# Altium PCB dcdc.PcbDoc
Units mm, origin at the board's own origin, x right, y up, seen from the top; angles counter-clockwise.
Board outline 19.5 x 19 mm, 2 copper layers (Top Layer, Bottom Layer); 10 components, 7 nets, 32 pads, 0 vias.
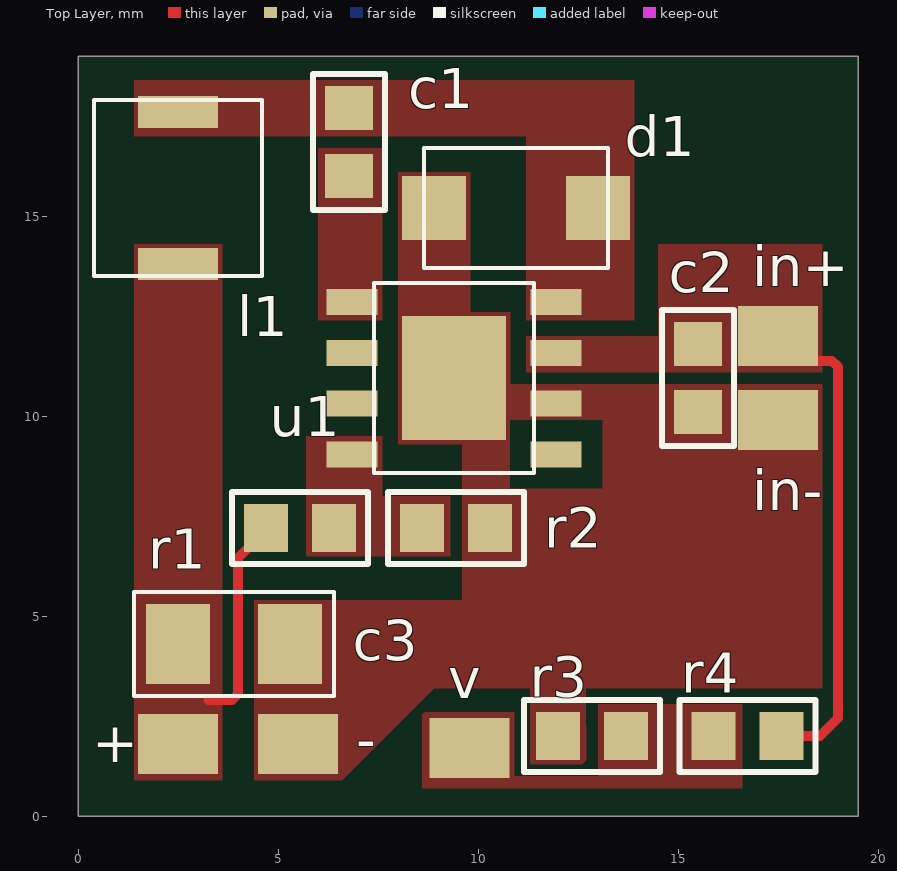
[diagram p0: Top Layer view]
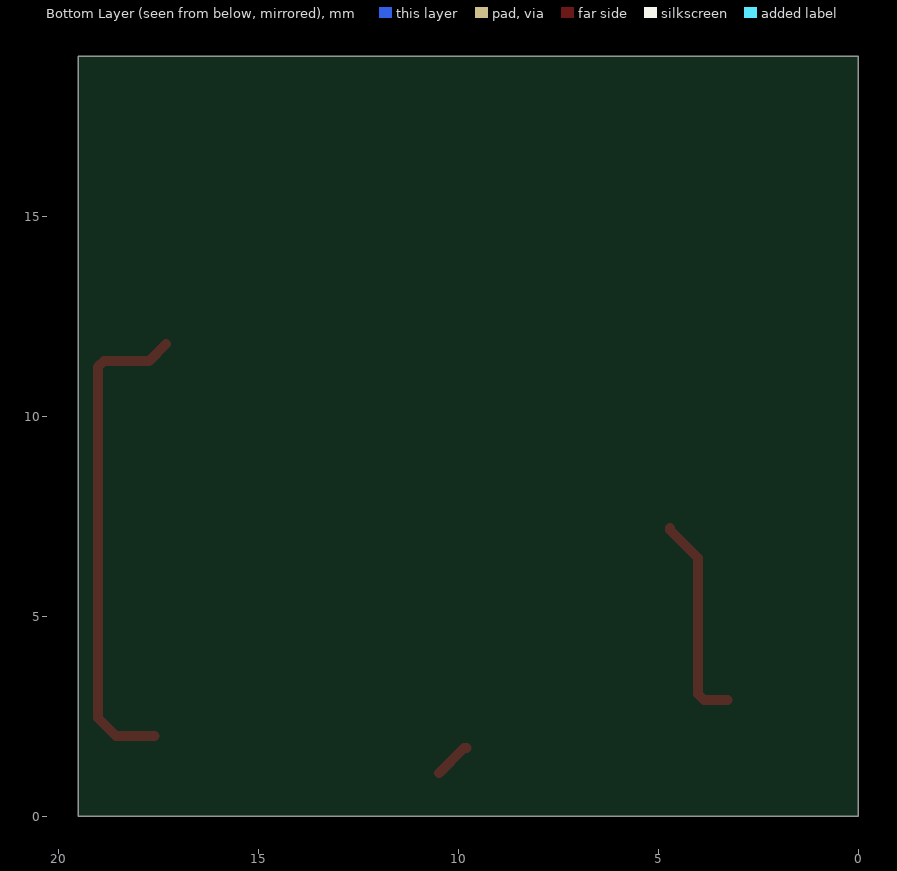
[diagram p1: Bottom Layer view, seen from below]

## Layer stack, top to bottom
Top Solder: solder mask 0.0102, Solder Resist, Dk 3.5
Top Layer: signal copper 0.0356
Dielectric 1: dielectric 0.32, FR-4, Dk 4.8
Bottom Layer: signal copper 0.0356
Bottom Solder: solder mask 0.0102, Solder Resist, Dk 3.5

## Board outline
0,0 19.5,0 19.5,19 0,19

## Design rules (kind name [scope] priority, off if disabled: settings)
Clearance [All] p1: gap=0.254 ignorepadtopadclearanceinfootprint=FALSE except(0: Arc-Hole Track-Hole SMDPad-Hole THPad-Hole Via-Hole Fill-Hole Poly-Hole Region-Hole Text-Hole)
PolygonConnect [All] p1: connectstyle=Relief reliefconductorwidth=0.254 reliefentries=4 polygonreliefangle="90 Angle" airgapwidth=0.254
RoutingVias [All] p1: holewidth=0.711 width=1.27 viastyle="Through Hole" minholewidth=0.711 minwidth=1.27 maxholewidth=0.711 maxwidth=1.27
SolderMaskExpansion [All] p1: expansion=0.102 istentingtop=FALSE
Width [All] p1: maxlimit=0.254 minlimit=0.254 preferedwidth=0.254
30 further rules are at their usual default settings.

## Components (designator, comment, footprint, x,y, rotation, side; value= is the part's Value field where it differs from the comment)
c1 "Comment" 0603 6.905,16.963 r0 top
c2 "Comment" 0603 15.636,11.063 r0 top
c3 "Comment" 1206 3.64,3.53 r0 top
d1 "Comment" SS34 10.85,16.3 r0 top
l1 "Comment" inductor 2.6,15.65 r0 top
r1 "Comment" 0603 5.437,7.336 r90 top
r2 "Comment" 0603 9.337,7.336 r90 top
r3 "Comment" 0603 12.737,2.136 r90 top
r4 "Comment" 0603 16.621,2.136 r90 top
u1 "Comment" tps5430 7.4,13.32 r0 top

## Footprints (in the part's own frame and the unit in brackets; to place one, negate y for a bottom-side part, rotate by r counter-clockwise, add the part's x,y. Pads: shape width x height; smd on the part's side, far side on the other; paste and mask are expansions set on the pad)
0603 [mm] "0603"
  rect 1.2x1.1 smd: 1(-0.136,-0.963) 1(-0.136,0.737)
  silkscreen extent -1.04,-1.81 0.76,1.59
1206 [mm] "1206"
  rect 1.6x2 smd: 10(-1.14,0.77) 10(1.66,0.77)
  silkscreen extent -2.24,-0.53 2.76,2.07
inductor [mm] "inductor"
  rect 2x0.8 smd: 7(-0.1,-1.85) 7(-0.1,1.95)
  silkscreen extent -2.2,-2.15 2,2.25
SS34 [mm] "SS34"
  rect 1.6x1.6 smd: 8(-1.95,-1.1) 8(2.15,-1.1)
  silkscreen extent -2.2,-2.6 2.4,0.4
tps5430 [mm] "tps5430"
  rect 1.27x0.65 smd: 9(-0.55,-4.28) 9(-0.55,-3.01) 9(-0.55,-1.74) 9(-0.55,-0.47) 9(4.55,-4.28) 9(4.55,-3.01) 9(4.55,-1.74) 9(4.55,-0.47)
  rect 2.6x3.1 smd: 9(2,-2.375)
  silkscreen extent 0,-4.75 4,0

## Free pads (board coordinates)
  rect 2x1.5 smd: 2(2.5,1.8) 2(5.5,1.8) 2(9.788,1.7) 2(17.5,9.9) 2(17.5,12)

## Nets (pads, with @x,y where several pads share a name; then routed paths per layer and width w, separated by ;. In a path a pad name is that pad's centre, name@x,y a point inside that pad or via, vN(x,y) a via of type N, cw(c..) or ccw(c..) an arc to the next point about the centre after c; other vN are vias at no path point)
boot: c1.1@6.769,16 u1.9@6.85,12.85
gnd: c2.1@15.5,10.1 c3.10@5.3,4.3 d1.8@8.9,15.2 pad.2@5.5,1.8 pad.2@17.5,9.9 r2.1@10.3,7.2 r3.1@12,2 u1.9@9.4,10.945 u1.9@11.95,10.31
in: c2.1@15.5,11.8 pad.2@17.5,12 r4.1@17.584,2 u1.9@11.95,11.58 | length 12.3
  Top Layer w0.254: pad.2@17.3,11.8 17.723,11.377 18.851,11.377 19,11.228 19,2.449 18.551,2 r4.1@17.584,2
loop: c1.1@6.769,17.7 d1.8@13,15.2 l1.7@2.5,17.6 u1.9@11.95,12.85
out: c3.10@2.5,4.3 l1.7@2.5,13.8 pad.2@2.5,1.8 r1.1@4.7,7.2 | length 5.2
  Top Layer w0.254: 3.267,2.9 3.851,2.9 4,3.049 4,6.45 4.7,7.15 r1.1@4.7,7.2
sense: r1.1@6.4,7.2 r2.1@8.6,7.2 u1.9@6.85,9.04
v: pad.2@9.788,1.7 r3.1@13.7,2 r4.1@15.884,2 | length 0.9
  Top Layer w0.254: pad.2@9.788,1.7 9.85,1.7 pad.2@10.473,1.077
pads on no net: u1.9@6.85,10.31 u1.9@6.85,11.58 u1.9@11.95,9.04

## Polygon pours and split planes (outlines as drawn)
v on Top Layer "V_L01_P006" (solid, pour order 6): 13,2.8 16.6,2.8 16.6,0.7 8.6,0.7 8.6,2.6 10.9,2.6 10.9,1 13,1
gnd on Top Layer "GND_L01_P002" (solid, pour order 2): 8,16.1 8,9.3 9.6,9.3 9.6,5.4 4.4,5.4 4.4,0.9 6.6,0.9 8.9,3.2 11.3,3.2 11.3,1.3 12.7,1.3 12.691,3.2 18.6,3.2 18.6,10.8 10.8,10.8 10.8,9.9 13.1,9.9 13.1,8.2 10.8,8.2 10.8,12.6 9.8,12.6 9.8,16.1
boot on Top Layer "BOOT_L01_P005" (solid, pour order 5): 7.6,12.4 7.6,16.7 6,16.7 6,12.4
sense on Top Layer "SENSE_L01_P004" (solid, pour order 4): 5.7,9.5 5.7,7.9 5.7,6.5 9.3,6.5 9.3,8 7.6,8 7.6,9.5
out on Top Layer "OUT_L01_P000" (solid, pour order 0): 1.4,14.3 1.4,0.9 3.6,0.9 3.6,1.2 3.6,14.3
in on Top Layer "IN_L01_P003" (solid, pour order 3): 11.2,11.1 18.6,11.1 18.6,14.3 14.5,14.3 14.5,12 11.2,12
loop on Top Layer "LOOP_L01_P001" (solid, pour order 1): 1.4,17 11.2,17 11.2,12.4 13.9,12.4 13.9,18.4 1.4,18.4

## Silkscreen, mask and mechanical layers (free items; w line width, h text height)
Top Overlay:
  text "in+" at 16.855,13.25 h1
  text "in-" at 16.855,7.65 h1
  text "v" at 9.25,2.95 h1
  text "-" at 6.95,1.422 h1
  text "+" at 0.35,1.35 h1
Mechanical 1:
  lines w0.1: 0.1,0.1 19.4,0.1 19.4,18.9 0.1,18.9 0.1,0.1